# Altium PCB Elevator_LeTrungHieu.PcbDoc
Units mm, origin at the board's own origin, x right, y up, seen from the top; angles counter-clockwise.
Board outline 120.08 x 80.02 mm, 2 copper layers (Top Layer, Bottom Layer); 25 components, 33 nets, 126 pads, 2 vias.
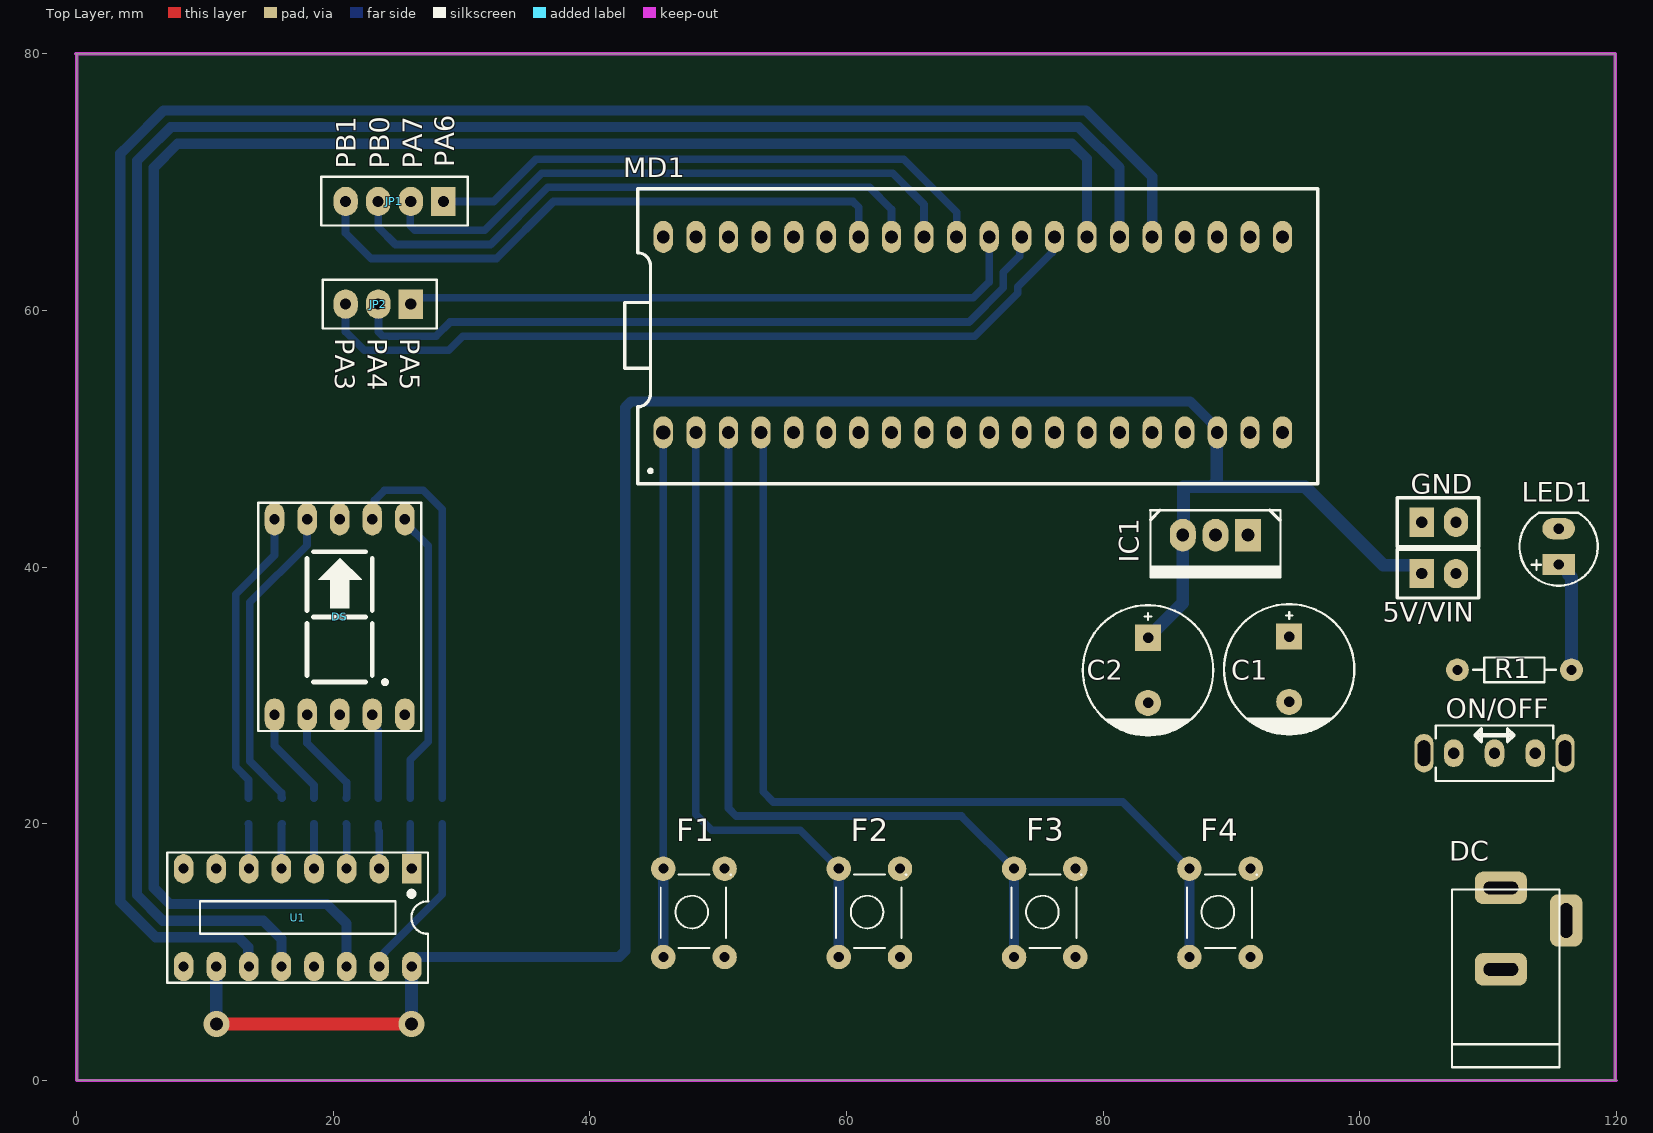
[diagram p0: Top Layer view]
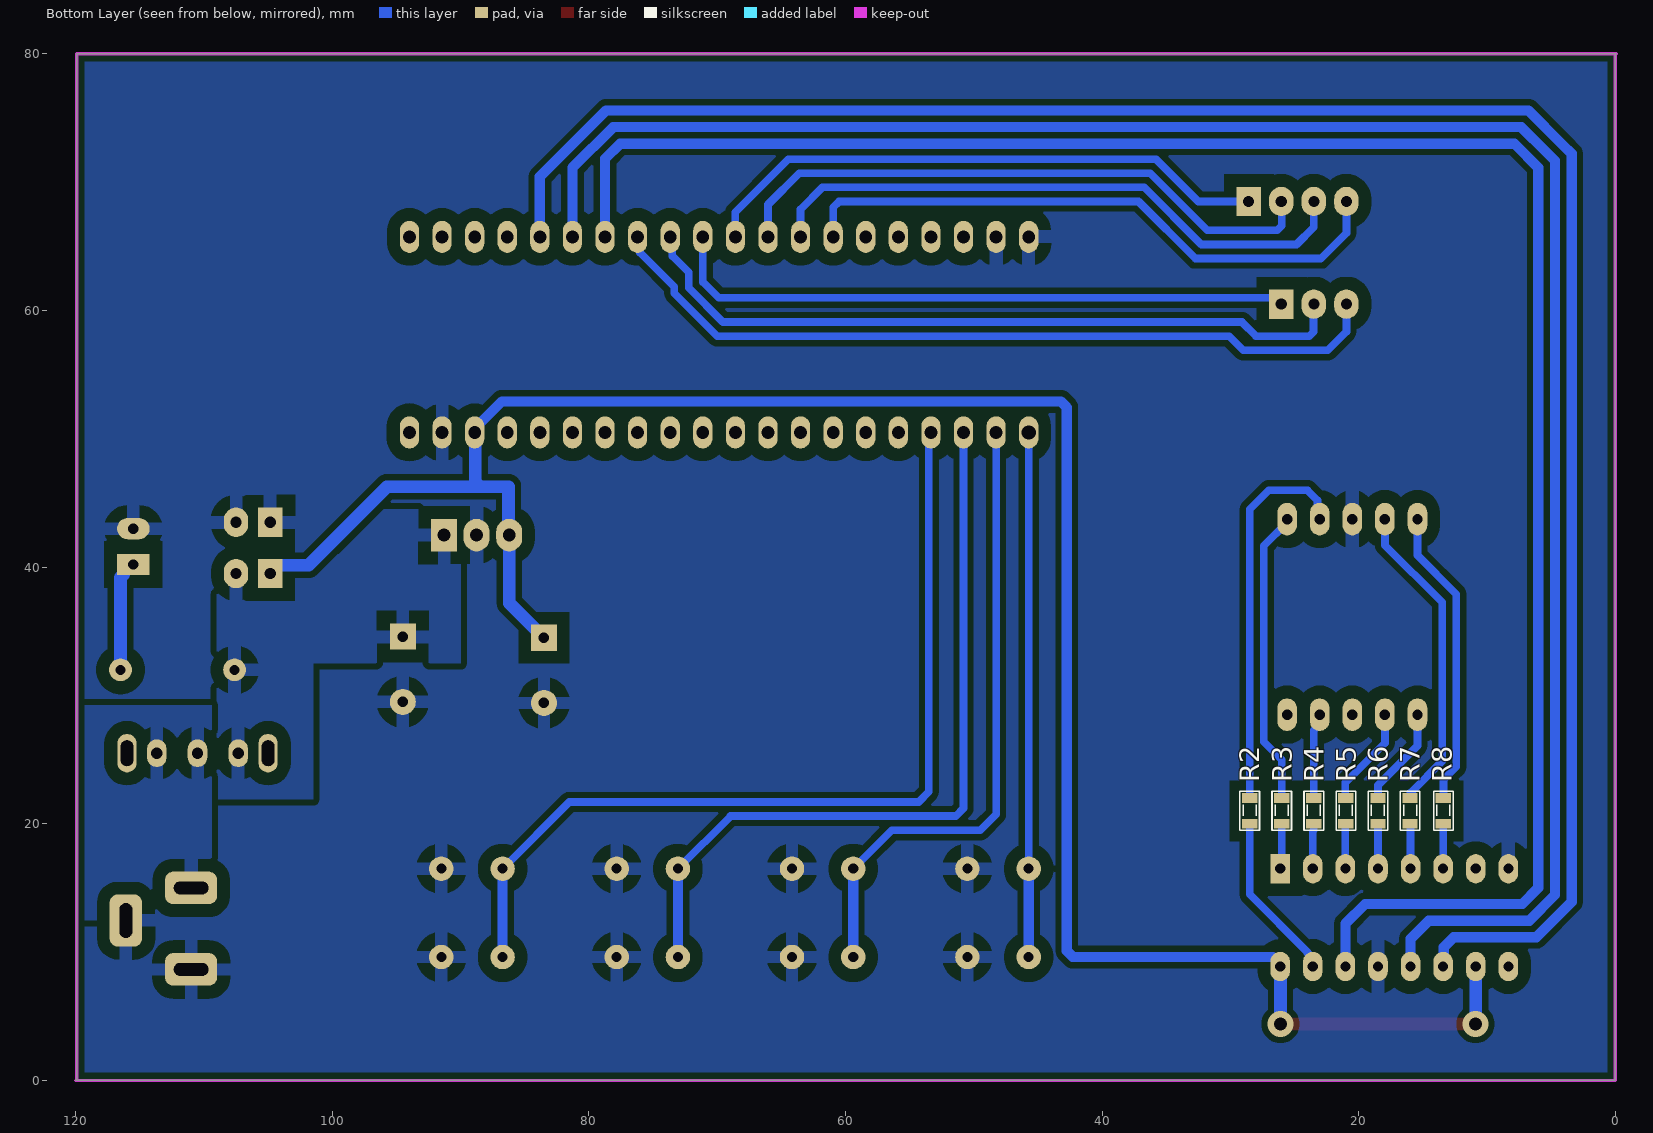
[diagram p1: Bottom Layer view, seen from below]
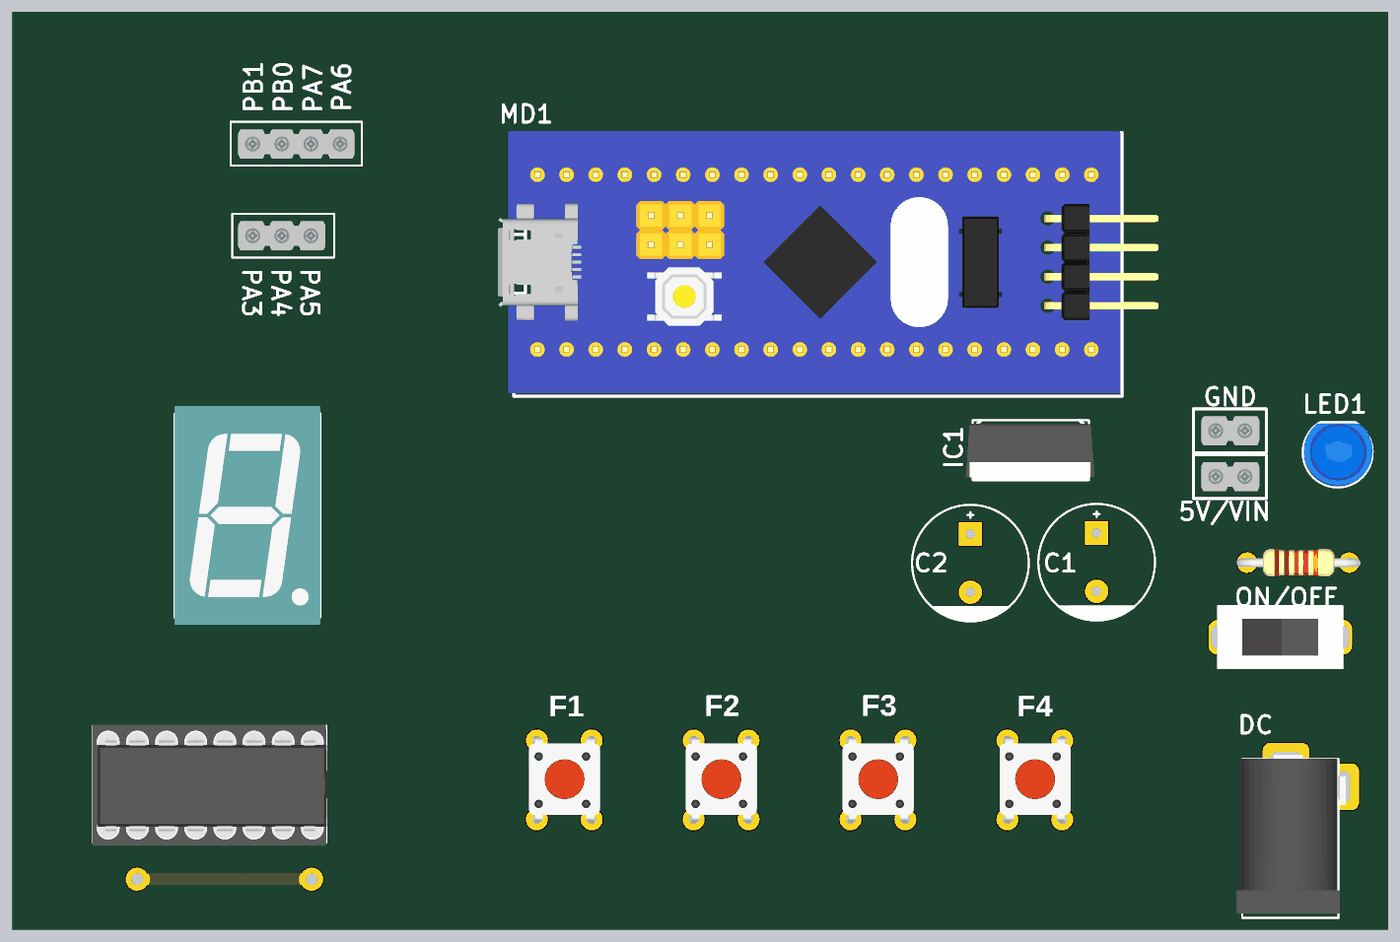
[diagram p2: 3D render of the assembled board from above, using the file's embedded part models]
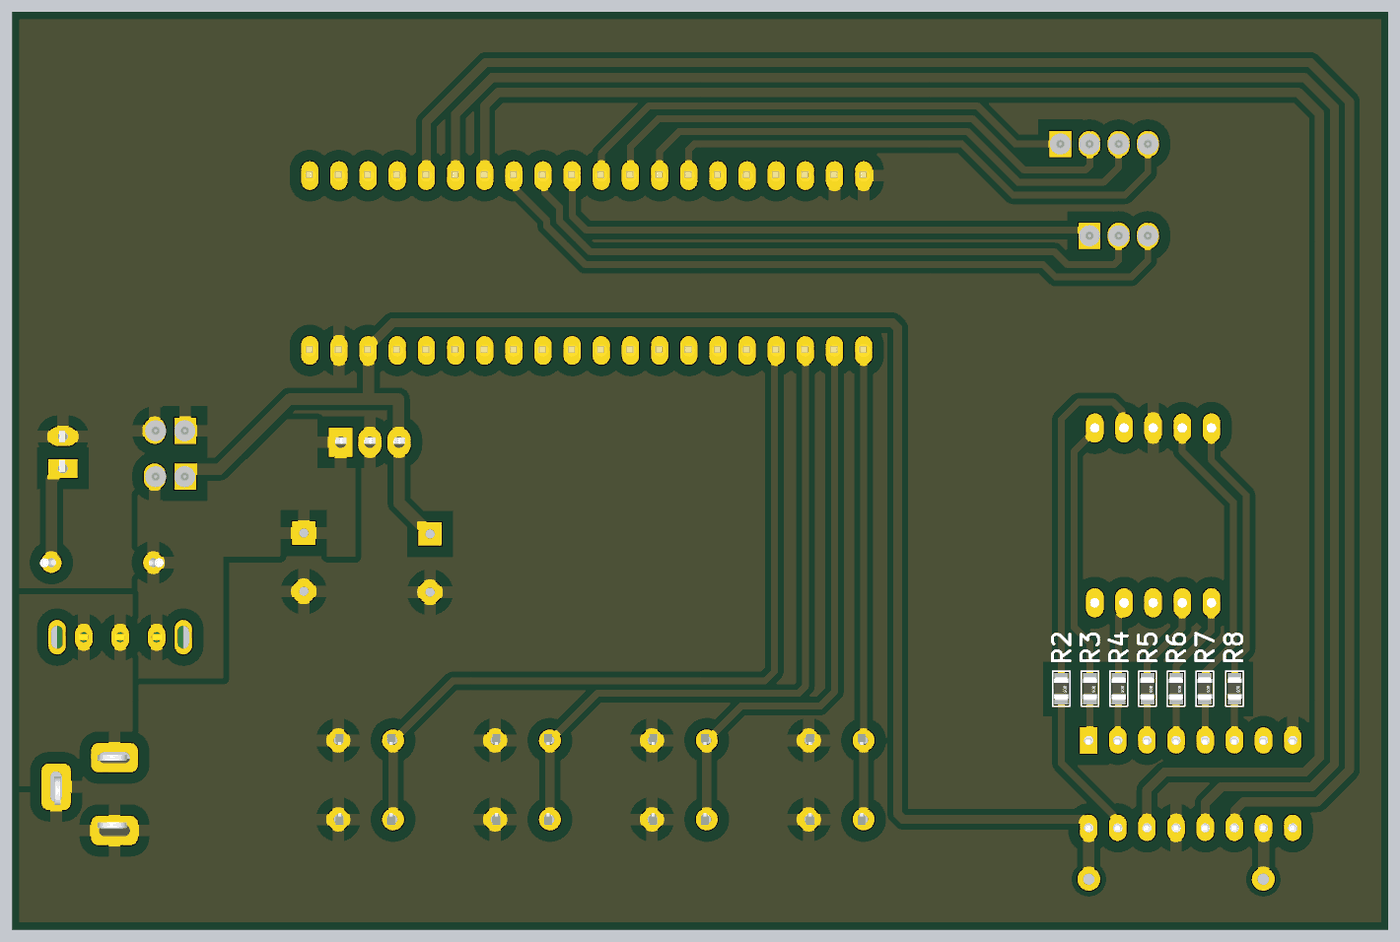
[diagram p3: 3D render of the assembled board from below, using the file's embedded part models]

## Layer stack, top to bottom
Top Solder: solder mask 0.0102, Solder Resist, Dk 3.5
Top Layer: signal copper 0.0356
Dielectric 1: dielectric 0.32, FR-4, Dk 4.8
Bottom Layer: signal copper 0.0356
Bottom Solder: solder mask 0.0102, Solder Resist, Dk 3.5

## Board outline
0,0 0,80 -0.08,80.023 119.92,80.023 119.92,0.023 120,0

## Design rules (kind name [scope] priority, off if disabled: settings)
Clearance [All] p1: gap=0.5 ignorepadtopadclearanceinfootprint=FALSE except(0.2: THPad-THPad; 1: SMDPad-Fill SMDPad-Poly SMDPad-Region THPad-Fill THPad-Poly THPad-Region)
PolygonConnect [All] p1: connectstyle=Relief reliefconductorwidth=1 reliefentries=4 polygonreliefangle="90 Angle" airgapwidth=1
RoutingVias [All] p1: holewidth=1 width=2 viastyle="Through Hole" minholewidth=1 minwidth=2 maxholewidth=1 maxwidth=2
SolderMaskExpansion [All] p1: expansion=0.102 istentingtop=FALSE
Width [All] p1: maxlimit=1 minlimit=0.6 preferedwidth=0.8
30 further rules are at their usual default settings.

## Components (designator, comment, footprint, x,y, rotation, side; value= is the part's Value field where it differs from the comment)
5V/VIN "JP3" jam2 104.833,39.5 r0 top
C1 "CAP hoa" CP2/4 94.5,34.58 r270 top
C2 "CAP hoa" CP2/4 83.5,34.5 r270 top
DC "POWER" DC5.5*2.1 113.54,11.825 r90 top
DS "7SEG S" 7SEGS 15.42,28.5 r0 top value="LED 7S SEG"
F1 "SW" SW4 45.522,9.947 r90 top value="Button chip 4 pin"
F2 "SW" SW4 59.188,9.947 r90 top value="Button chip 4 pin"
F3 "SW" SW4 72.855,9.947 r90 top value="Button chip 4 pin"
F4 "SW" SW4 86.522,9.947 r90 top value="Button chip 4 pin"
GND "JP4" jam2 104.833,43.5 r0 top
IC1 "LM7805" QTO-220 91.29,42.5 r180 top
JP1 "JP1" jam4 20.96,68.525 r180 top value="Connector 4"
JP2 "JP2" jam3 26.167,60.5 r180 top value="Connector 3"
LED1 "LED" LED-5-BLUE 115.5,41.603 r90 top value="LED 3 ly Single Colour"
MD1 "STM32F103C8T6 Mini" "STM32F103C8T6 Mini" 45.72,50.5 r90 top
ON/OFF "SW102A" SW102 105.001,25.5 r90 top value="Switch 102 On Board"
R1 "330R" R1/4W 116.5,32 r180 top
R2 "1k" SM-RES-0805 28.5,22.159 r270 bottom value="R1/4W - 1K"
R3 "1k" SM-RES-0805 26,22.159 r270 bottom value="R1/4W - 1K"
R4 "1k" SM-RES-0805 23.5,22.159 r270 bottom value="R1/4W - 1K"
R5 "1k" SM-RES-0805 21,22.159 r270 bottom value="R1/4W - 1K"
R6 "1k" SM-RES-0805 18.5,22.159 r270 bottom value="R1/4W - 1K"
R7 "1k" SM-RES-0805 16,22.159 r270 bottom value="R1/4W - 1K"
R8 "1k" SM-RES-0805 13.4,22.159 r270 bottom value="R1/4W - 1K"
U1 "74HC595" DIP16 26.12,16.5 r180 top

## Footprints (in the part's own frame and the unit in brackets; to place one, negate y for a bottom-side part, rotate by r counter-clockwise, add the part's x,y. Pads: shape width x height; smd on the part's side, far side on the other; paste and mask are expansions set on the pad)
7SEGS [mil] "DIP 10 Leads; Body 12 x 15 mm; Pitch 0.5 mm"
  oval 60x100 hole 32: 1(0,0) 2(100,0) 3(200,0) 4(300,0) 5(400,0) 6(400,600) 7(300,600) 8(200,600) 9(100,600) 10(0,600)
  silkscreen extent -50,-50 450,650, body extent -50,-75 450,675, height 316
CP2/4 [mil] "Tu hoa 1000uF/16V/25V"
  rect 80x80 hole 32: 1(0,0)
  round 80 hole 32: 2(200,0)
  silkscreen extent -100,-200 300,200
DC5.5*2.1 [mm] "Jac DC input"
  rrect50% 2.54x4.064 hole 1 slot 2.7 at 90 deg: 1(3.175,2.54) 2(-3.175,2.54)
  rrect50% 4.064x2.54 hole 1 slot 2.7 at 0 deg: 3(0.635,-2.54)
  silkscreen extent -10.79,-2.03 3.05,6.35, body extent -10.42,-2.67 3.4,6.84, height 11.02
DIP16 [mil]
  rect 60x90 hole 31: 1(0,0)
  oval 60x90 hole 31: 2(100,0) 3(200,0) 4(300,0) 5(400,0) 6(500,0) 7(600,0) 8(700,0) 9(700,300) 10(600,300) 11(500,300) 12(400,300) 13(300,300) 14(200,300) 15(100,300) 16(0,300)
  silkscreen extent -50,-50 750,350, body extent -52,-53 752,360, height 317
jam2 [mil]
  rect 75x90 hole 34: 1(0,0)
  oval 75x90 hole 34: 2(105,0)
  silkscreen extent -75,-75 175,75, body extent -48,-50 152,50, height 704
jam3 [mil]
  rect 75x90 hole 34: 1(5,0)
  oval 75x90 hole 34: 2(105,0) 3(205,0)
  silkscreen extent -75,-75 275,75, body extent -45,-50 255,50, height 704
jam4 [mil]
  rect 75x90 hole 34: 1(-300,1)
  oval 75x90 hole 34: 2(-200,1) 3(-100,1) 4(0,1)
  silkscreen extent -375,-75 75,75, body extent -350,-49 50,51, height 704
LED-5-BLUE [mil] "LED 2 PIN, 5 ly , Only colour, pin to pin 110mil"
  rect 65x100 hole 32: 1(-55,0)
  oval 65x100 hole 32: 2(55,0)
  silkscreen extent -120,-120 104,120, body extent -113,-120 100,117, height 339
QTO-220 [mil] "TO-220 - 1-2-3"
  rect 80x100 hole 39: 1(0,0)
  oval 80x100 hole 39: 2(100,0) 3(200,0)
  silkscreen extent -100,-76 300,130, body extent -119,-64 322,121, height 905
R1/4W [mil] "R 1/4W, 2 Pin, 350mil"
  round 70 hole 31: 1(0,0) 2(350,0)
  silkscreen extent 48,-38 302,38, body extent -40,-47 386,47, height 111
SM-RES-0805 [mil]
  rect 30x47.24 smd: 1(6,0) 2(85,0)
  silkscreen extent -15,-30 105,30, body extent 6,-25 84,25, height 31
"STM32F103C8T6 Mini" [mm]
  oval 2.5x1.5 hole 1.1: 1(0,0)
  oval 2.5x1.5 hole 1: 2(0,-2.54) 3(0,-5.08) 4(0,-7.62) 5(0,-10.16) 6(0,-12.7) 7(0,-15.24) 8(0,-17.78) 9(0,-20.32) 10(0,-22.86) 11(0,-25.4) 12(0,-27.94) 13(0,-30.48) 14(0,-33.02) 15(0,-35.56) 16(0,-38.1) 17(0,-40.64) 18(0,-43.18) 19(0,-45.72) 20(0,-48.26) 21(15.24,-48.26) 22(15.24,-45.72) 23(15.24,-43.18) 24(15.24,-40.64) 25(15.24,-38.1) 26(15.24,-35.56) 27(15.24,-33.02) 28(15.24,-30.48) 29(15.24,-27.94) 30(15.24,-25.4) 31(15.24,-22.86) 32(15.24,-20.32) 33(15.24,-17.78) 34(15.24,-15.24) 35(15.24,-12.7) 36(15.24,-10.16) 37(15.24,-7.62) 38(15.24,-5.08) 39(15.24,-2.54) 40(15.24,0)
  silkscreen extent -4,-51 19,3, body extent -3.73,-54.19 19.13,3.37, height 12.77
SW4 [mil] "SW button 4pin, 250 x250 mil"
  round 75 hole 31: 1(-13,-8) 1(258,-8) 2(-13,-196) 2(258,-196)
  silkscreen extent 15,-215 240,0, body extent -31,-225 281,19, height 276
SW102 [mil] "Switch 102 On Board nho"
  oval 85x60 hole 35: 1(0,-341.5) 2(0,-216.5) 3(0,-91.5)
  oval 118.11x59.06 hole 39.37 slot 78.74 at 0 deg: 5(0,0) 5(0,-433)
  silkscreen extent -85,-396 85,-36, body extent -110,-433 110,0, height 384

## Part data
5V/VIN GND: library part "Jam 2", "jam 2"
C1 C2: "Cap"
DC: library part DCIN
DS: library part LED7S, "Single 7 Seg Dipslay"
F1 F2 F3 F4: library part SW4, "Switch button 4 pin"
IC1: library part LM78xx, "On ap +, from + 5 to + 24VDC"
JP1: library part "jam 4", "jam 4"
JP2: library part "jam 3", "jam 3"
LED1: library part LED_1, "LED Single colour Green and Red"
ON/OFF: "Switch 102 on Broad"
R1: library part Res, "Res"
R2 R3 R4 R5 R6 R7 R8: library part R1/4W, "Resistor 1/4W"
U1: "8-Bit Serial-Input/Serial or Prallel-Output Shift Register with Latched 3-State Outputs", Code_JEDEC=MS-001-BB, ComponentLink1Description="Manufacturer Link", ComponentLink1URL=http://www.onsemi.com/, ComponentLink2Description=Datasheet, ComponentLink2URL=http://www.onsemi.com/pub/Collateral/MC74HC595A-D.PDF, DatasheetVersion=Mar-2000, PackageDescription="DIP; 16 Leads; Row Spacing 7.62 mm; Pitch 2.54 mm", PackageReference=648-08, PackageVersion=Apr-2000, Published=15-Apr-2002, Publisher="Altium Limited"

## Via types
v1: diameter 2, hole 1, Top Layer to Bottom Layer, 2 vias

## Nets (pads, with @x,y where several pads share a name; then routed paths per layer and width w, separated by ;. In a path a pad name is that pad's centre, name@x,y a point inside that pad or via, vN(x,y) a via of type N, cw(c..) or ccw(c..) an arc to the next point about the centre after c; other vN are vias at no path point)
5V: 5V/VIN.1 C2.1 IC1.3 MD1.18 U1.10 U1.16 | length 170.1
  Top Layer w1: v1(10.9,4.4) v1(26.1,4.4)
  Bottom Layer w0.8: U1.16 26.12,9.065 26.678,9.623 42.281,9.623 42.75,10.092 42.75,52.451 43.219,52.92 86.773,52.92 88.56,51.134 88.577,51.134 88.9,50.811 MD1.18
  Bottom Layer w1: U1.10 10.88,4.42 v1(10.9,4.4) ; v1(26.1,4.4) 26.1,8.86 U1.16 ; C2.1 86.21,37.21 IC1.3 86.261,42.551 86.261,46.261 88.5,46.261 ; MD1.18 88.859,50.459 88.859,46.62 88.5,46.261 ; 5V/VIN.1 104.833,39.69 104.381,40.143 101.857,40.143 95.739,46.261 88.5,46.261
GND: C1.2 C2.2 DC.2 DC.3 DS.8 F1.2 F2.2 F3.2 F4.2 GND.1 GND.2 IC1.2 LED1.2 MD1.19 MD1.39 MD1.40 U1.8 U1.13
NetDC_1: DC.1 ON/OFF.1 ON/OFF.2
NetDS_1: DS.1 R6.1 | length 7.8
  Bottom Layer w0.6: DS.1 15.42,26.08 18.5,23 R6.1
NetDS_2: DS.2 R5.1 | length 7.8
  Bottom Layer w0.6: DS.2 17.96,26.29 21.04,23.21 21.04,22.047 R5.1
NetDS_4: DS.4 R4.1 | length 6.7
  Bottom Layer w0.6: DS.4 23.04,27.742 23.5,27.282 R4.1
NetDS_6: DS.6 R3.1 | length 23.1
  Bottom Layer w0.6: DS.6 25.58,43.482 27.4,41.662 27.4,26.4 26,25 R3.1
NetDS_7: DS.7 R2.1 | length 30.3
  Bottom Layer w0.6: DS.7 23.217,43.917 23.217,45.217 24,46 27,46 28.5,44.5 R2.1
NetDS_9: DS.9 R7.1 | length 24.6
  Bottom Layer w0.6: R7.1 15.96,22.047 15.96,22.43 13.5,24.89 13.5,37.25 17.96,41.71 DS.9
NetDS_10: DS.10 R8.1 | length 23.4
  Bottom Layer w0.6: R8.1 13.4,23.395 13.42,23.415 12.4,24.435 12.4,37.9 15.42,40.92 DS.10
NetLED1_1: LED1.1 R1.1 | length 8.9
  Bottom Layer w1: LED1.1 115.945,40.206 116.27,39.881 116.27,39.436 116.5,39.206 R1.1
NetR2_2: R2.2 U1.15 | length 13.2
  Bottom Layer w0.6: U1.15 23.58,9.511 23.996,9.927 23.996,9.996 28.5,14.5 R2.2
NetR3_2: R3.2 U1.1 | length 3.5
  Bottom Layer w0.6: R3.2 26,16.62 U1.1
NetR4_2: R4.2 U1.2 | length 3.5
  Bottom Layer w0.6: R4.2 23.5,19.5 23.58,19.42 U1.2
NetR5_2: R5.2 U1.3 | length 3.5
  Bottom Layer w0.6: R5.2 21.04,19.96 U1.3
NetR6_2: R6.2 U1.4 | length 3.5
  Bottom Layer w0.6: U1.4 R6.2
NetR7_2: R7.2 U1.5 | length 3.5
  Bottom Layer w0.6: U1.5 15.96,19.96 R7.2
NetR8_2: R8.2 U1.6 | length 3.5
  Bottom Layer w0.6: R8.2 13.42,19.98 U1.6
PA0: MD1.25 U1.11 | length 159.9
  Bottom Layer w0.8: U1.11 13.367,8.933 13.367,10.383 12.6,11.15 6.173,11.15 3.4,13.923 3.4,15.032 3.4,72.22 4.078,72.898 6.78,75.6 78.638,75.6 83.82,70.418 MD1.25
PA1: MD1.26 U1.12 | length 156.4
  Bottom Layer w0.8: U1.12 15.96,11.04 14.55,12.45 7.82,12.45 6.712,12.45 4.7,14.462 4.7,15.57 4.7,71.682 5.378,72.36 7.318,74.3 78.1,74.3 81.28,71.12 MD1.26
PA2: MD1.27 U1.14 | length 155.7
  Bottom Layer w0.8: U1.14 21.04,12.21 19.5,13.75 7.25,13.75 6,15 6,71.143 7.857,73 77.561,73 78.74,71.821 MD1.27
PA3: JP2.3 MD1.28 | length 62.6
  Bottom Layer w0.6: JP2.3 20.96,58.351 22.411,56.9 29,56.9 30.1,58 70,58 73.345,61.345 73.345,61.845 76.028,64.528 76.028,65.568 MD1.28
PA4: JP2.2 MD1.29 | length 57.1
  Bottom Layer w0.6: JP2.2 23.519,60.481 23.519,58.351 23.87,58 28,58 29.1,59.1 69.544,59.1 72.22,61.776 72.22,62.97 73.508,64.258 73.508,65.588 MD1.29
PA5: JP2.1 MD1.30 | length 49.3
  Bottom Layer w0.6: JP2.1 26.54,61 69.889,61 71.12,62.231 MD1.30
PA6: JP1.1 MD1.31 | length 45
  Bottom Layer w0.6: JP1.1 32.5,68.5 35.8,71.8 64.45,71.8 68.58,67.67 MD1.31
PA7: JP1.2 MD1.32 | length 47.5
  Bottom Layer w0.6: JP1.2 26.002,68.462 26.002,66.601 26.353,66.25 31.806,66.25 36.256,70.7 63.604,70.7 66.04,68.264 MD1.32
PB0: JP1.3 MD1.33 | length 47.3
  Bottom Layer w0.6: JP1.3 23.5,66.5 24.85,65.15 32.261,65.15 36.711,69.6 61.79,69.6 63.5,67.89 MD1.33
PB1: JP1.4 MD1.34 | length 47.6
  Bottom Layer w0.6: JP1.4 20.96,66.04 22.95,64.05 32.717,64.05 37.167,68.5 60.5,68.5 60.96,68.04 MD1.34
PB12: F1.1 MD1.1 | length 40.9
  Bottom Layer w0.6: MD1.1 45.725,50.495 F1.1@45.725,16.5
  Bottom Layer w0.8: F1.1@45.725,9.617 F1.1@45.725,16.5
PB13: F2.1 MD1.2 | length 49.5
  Bottom Layer w0.6: MD1.2 48.26,20.74 49.5,19.5 56.391,19.5 F2.1@59.391,16.5
  Bottom Layer w0.8: F2.1@59.391,9.617 F2.1@59.391,16.5
PB14: F3.1 MD1.3 | length 60.4
  Bottom Layer w0.6: MD1.3 50.8,21.2 51.4,20.6 68.958,20.6 F3.1@73.058,16.5
  Bottom Layer w0.8: F3.1@73.058,9.617 F3.1@73.058,16.5
PB15: F4.1 MD1.4 | length 70.7
  Bottom Layer w0.6: MD1.4 53.5,50.34 53.5,22.5 54.3,21.7 81.525,21.7 F4.1@86.725,16.5
  Bottom Layer w0.8: F4.1@86.725,9.617 F4.1@86.725,16.5
VCC: 5V/VIN.2 C1.1 IC1.1 ON/OFF.3 R1.2
pads on no net: DS.3 DS.5 MD1.5 MD1.6 MD1.7 MD1.8 MD1.9 MD1.10 MD1.11 MD1.12 MD1.13 MD1.14 MD1.15 MD1.16 MD1.17 MD1.20 MD1.21 MD1.22 MD1.23 MD1.24 MD1.35 MD1.36 MD1.37 MD1.38 ON/OFF.5 U1.7 U1.9

## Polygon pours and split planes (outlines as drawn)
GND on Bottom Layer "NONET_L01_P-001" (solid, pour order 5): 0,80 120,80 120,0 0,0
NetDC_1 on Bottom Layer "NONET_L01_P-001" (solid, pour order 0): 109.4,29.25 120,29.25 120,12.5 109.4,12.5
VCC on Bottom Layer "NONET_L01_P-001" (solid, pour order 3): 109,21.9 109,41 99.5,41 96,44.5 90,44.5 90,32.5 101.5,32.5 101.5,21.9

## Keep-outs
Keep-Out Layer:
  lines w0.254: -0.08,80.023 119.92,80.023 119.92,0.023 ; 0,80 0,0 120,0

## Silkscreen, mask and mechanical layers (free items; w line width, h text height)
Top Overlay:
  text "PA6" at 29.446,71.154 h1.52 r90
  text "PB1" at 21.746,71.054 h1.52 r90
  text "PB0" at 24.346,71.054 h1.52 r90
  text "PA7" at 26.946,71.054 h1.52 r90
  text "PA3" at 20.138,57.846 h1.52 r270
  text "PA4" at 22.678,57.846 h1.52 r270
  text "PA5" at 25.218,57.846 h1.52 r270